# Altium PCB PCB1.PcbDoc
Units mm, origin at the board's own origin, x right, y up, seen from the top; angles counter-clockwise.
Board outline 106.93 x 40.39 mm, 2 copper layers (Top Layer, Bottom Layer); 17 components, 11 nets, 62 pads, 0 vias.
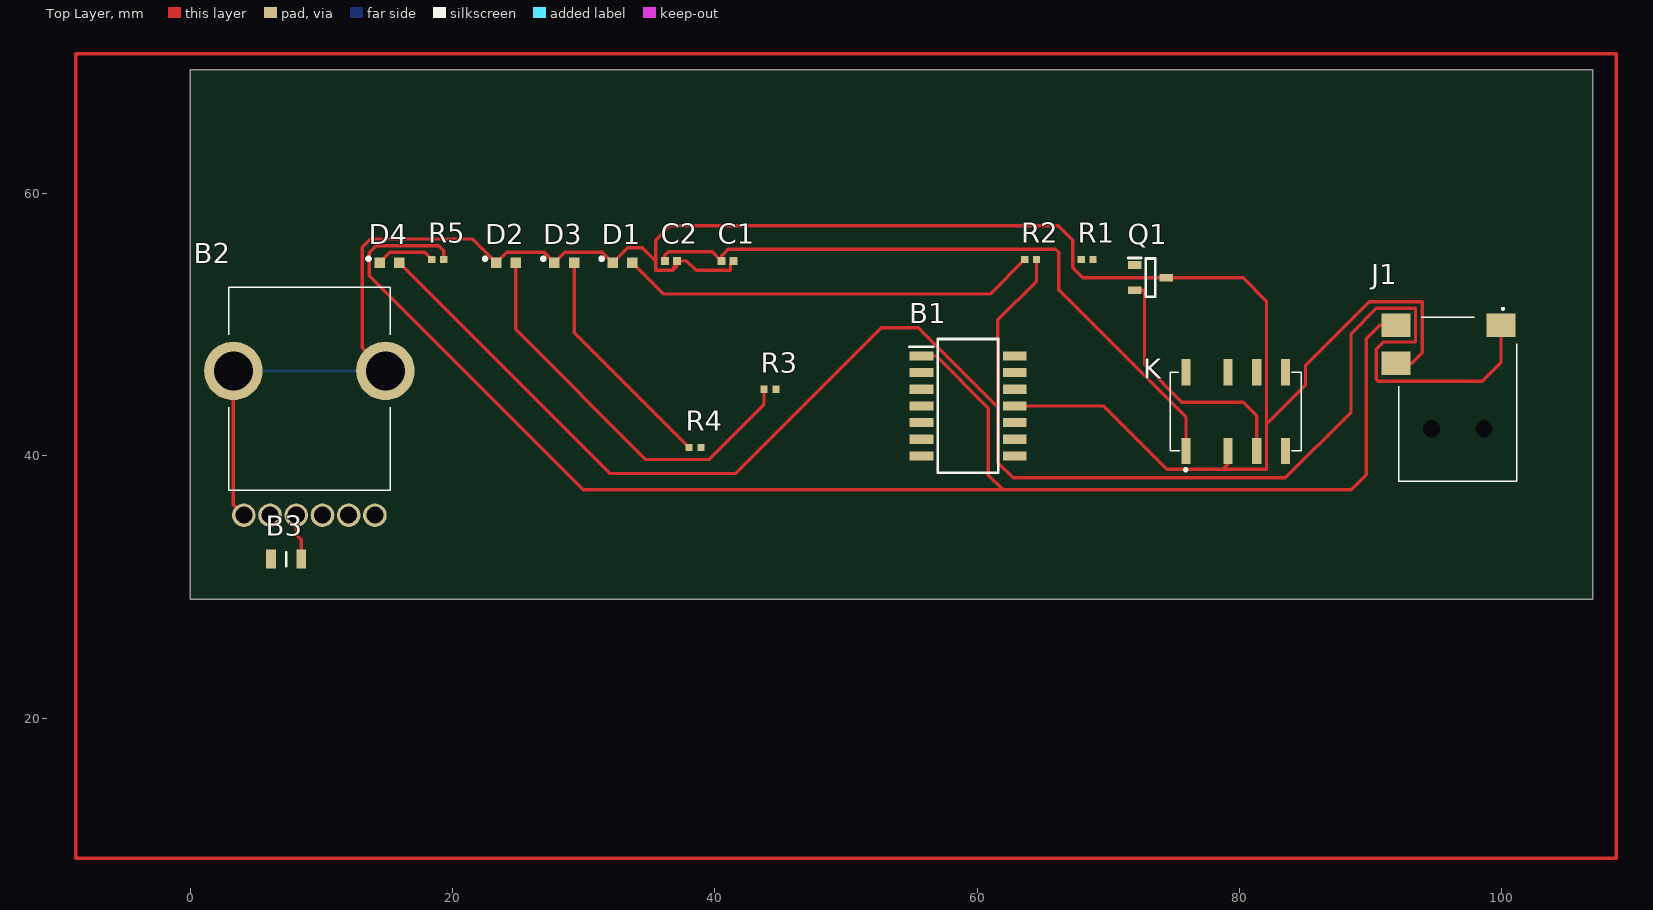
[diagram p0: Top Layer view]
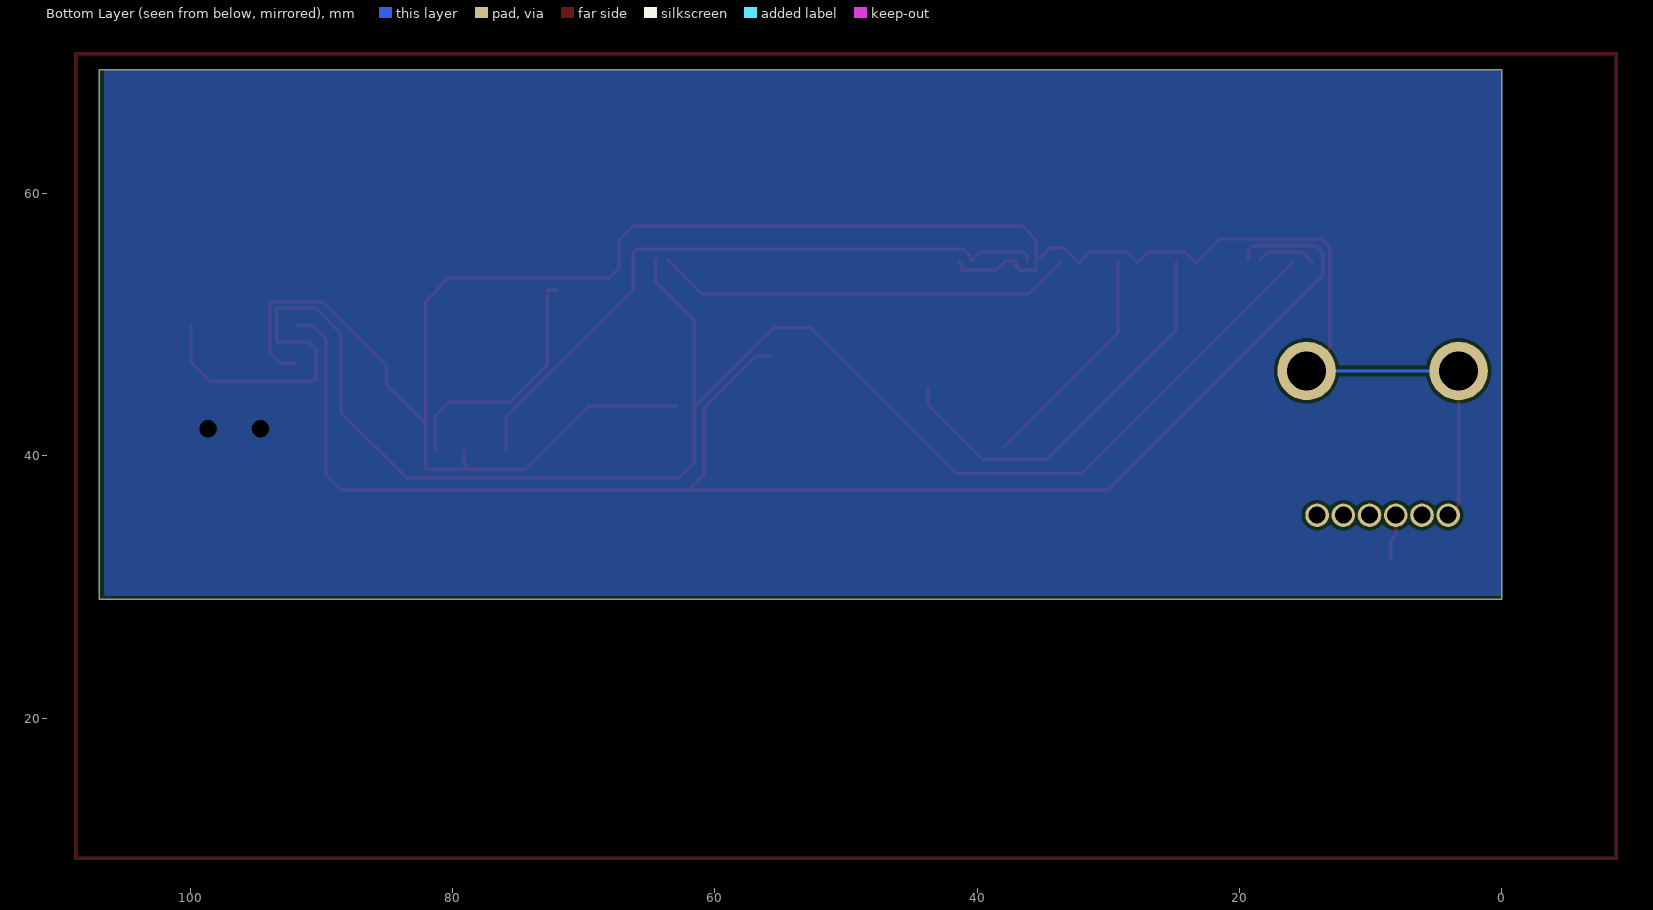
[diagram p1: Bottom Layer view, seen from below]
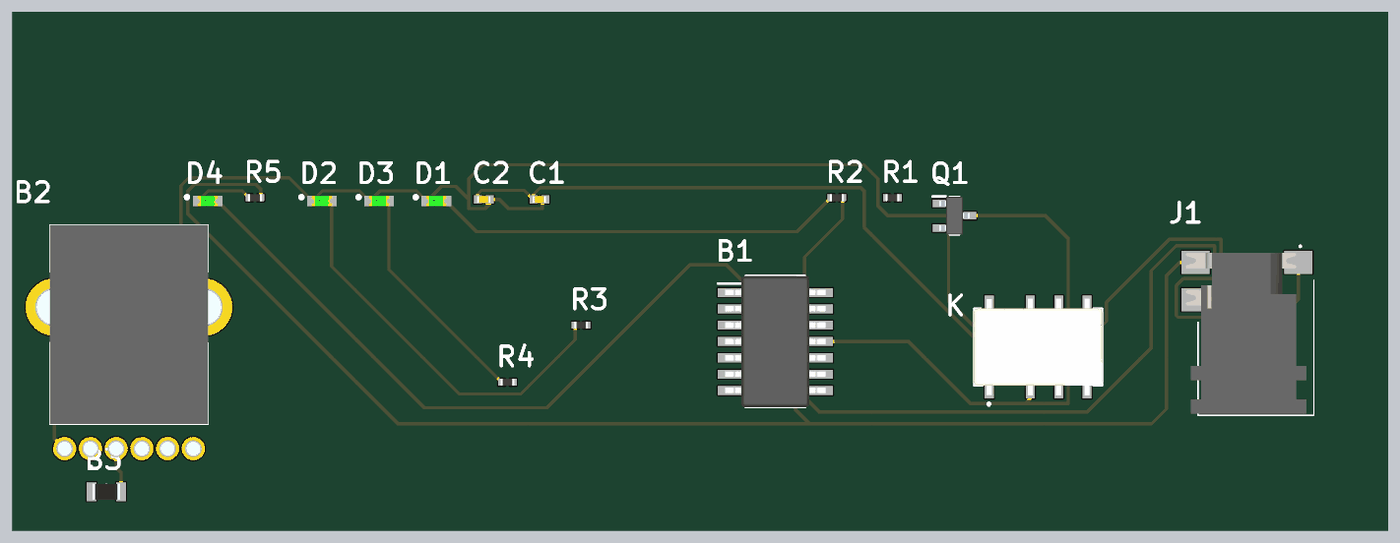
[diagram p2: 3D render of the assembled board from above, using the file's embedded part models]

## Layer stack, top to bottom
Top Solder: solder mask 0.0102, Solder Resist, Dk 3.5
Top Layer: signal copper 0.0356
Dielectric 1: dielectric 0.32, FR-4, Dk 4.8
Bottom Layer: signal copper 0.0356
Bottom Solder: solder mask 0.0102, Solder Resist, Dk 3.5

## Board outline
0,29.083 0,69.469 106.934,69.469 106.934,29.083

## Design rules (kind name [scope] priority, off if disabled: settings)
Clearance [All] p1: gap=0.254 ignorepadtopadclearanceinfootprint=FALSE except(0: Arc-Hole Track-Hole SMDPad-Hole THPad-Hole Via-Hole Fill-Hole Poly-Hole Region-Hole Text-Hole)
PolygonConnect [All] p1: connectstyle=Relief reliefconductorwidth=0.254 reliefentries=4 polygonreliefangle="90 Angle" airgapwidth=0.254
RoutingVias [All] p1: holewidth=0.711 width=1.27 viastyle="Through Hole" minholewidth=0.711 minwidth=1.27 maxholewidth=0.711 maxwidth=1.27
SolderMaskExpansion [All] p1: expansion=0.102 istentingtop=FALSE
SupplyNets "Schematic Supply Nets_4" [InNet('VCC')] p1: voltage=0.000
SupplyNets "Schematic Supply Nets_3" [InNet('+12')] p2: voltage=0.000
SupplyNets "Schematic Supply Nets_2" [InNet('GND')] p3: voltage=0.000
SupplyNets "Schematic Supply Nets_1" [InNet('+12V')] p4: voltage=0.000
SupplyNets "Schematic Supply Nets" [InNet('12V')] p5: voltage=0.000
Width [All] p1: maxlimit=0.254 minlimit=0.254 preferedwidth=0.254
30 further rules are at their usual default settings.

## Components (designator, comment, footprint, x,y, rotation, side; value= is the part's Value field where it differs from the comment)
B1 "LM324NSR" SOIC127P780X200-14N 59.305,43.815 r0 top
B2 "PTV112-4420A-B104" PTV1124420AB104 6.077,35.482 r0 top
B3 "NB12K00103JBB" RESC2212X50N 7.31,32.131 r0 top
C1 "100nF" CAPC1005X06N 40.965,54.864 r0 top
C2 "10µF" CAPC1005X06N 36.647,54.864 r0 top
D1 "LED-GREEN" SMD-1608-LED 32.964,54.737 r0 top
D2 "LED-GREEN" SMD-1608-LED 24.074,54.737 r0 top
D3 "LED-GREEN" SMD-1608-LED 28.519,54.737 r0 top
D4 "LED-GREEN" SMD-1608-LED 15.184,54.737 r0 top
J1 "ADC-028-1-T/R" PJ1021SMTTR 96.649,44.323 r90 top
K "IM06GR" RELAY_IM06GR 79.723,43.386 r90 top
Q1 "BCW66GLT3G" SOT96P237X111-3N 73.223,53.594 r0 top
R1 "1K" RESC1005X06N 68.397,54.991 r0 top
R2 "Value" RESC1005X06N 64.079,54.991 r0 top
R3 "400Ω" RESC1005X06N 44.203,45.085 r0 top
R4 "1kΩ" RESC1005X06N 38.483,40.64 r0 top
R5 "Value" RESC1005X06N 18.867,54.991 r0 top

## Footprints (in the part's own frame and the unit in brackets; to place one, negate y for a bottom-side part, rotate by r counter-clockwise, add the part's x,y. Pads: shape width x height; smd on the part's side, far side on the other; paste and mask are expansions set on the pad)
CAPC1005X06N [mm] "Chip Capacitor, 2-Leads, Body 1,00x0,50mm, IPC Medium Density"
  rect 0.62x0.62 smd: 1(-0.46,0) 2(0.46,0)
  body extent -0.53,-0.28 0.53,0.28, height 0.55
PJ1021SMTTR [mm]
  rect 1.8x2.2 smd: 1(5.65,-3.3) 2(2.75,4.7) 3(5.65,4.7)
  round 0.65 hole 1.3 unplated: MH1(-2.25,-2) MH2(-2.25,2)
  silkscreen extent -6.25,-4.5 6.95,4.5, body extent -6.12,-3.94 6.38,5.46, height 6.01
PTV1124420AB104 [mm]
  round 1.8 hole 1.3: A1(0,0) A2(-2,0) A3(8,0) B1(2,0) B2(4,0) B3(6,0)
  round 4.455 hole 2.97: MH1(-2.8,11) MH2(8.8,11)
  silkscreen extent -3.15,-1.45 9.15,17.4, body extent -4.17,-0.55 10.19,17.4, height 20.6
RELAY_IM06GR [mm]
  rect 2x0.7 smd: 1(-3,3.8) 2(-3,0.6) 3(-3,-1.6) 4(-3,-3.8) 5(3,-3.8) 6(3,-1.6) 7(3,0.6) 8(3,3.8)
  silkscreen extent -4.54,-5 3,5, body extent -3.75,-5 3.75,5, height 5.65
RESC1005X06N [mm] "Chip Resistor, 2-Leads, Body 1,00x0,50mm, IPC Medium Density"
  rect 0.55x0.55 smd: 1(-0.45,0) 2(0.45,0)
  body extent -0.53,-0.28 0.53,0.28, height 0.55
RESC2212X50N [mm]
  rect 0.75x1.45 smd: 1(-1.15,0) 2(1.15,0)
  silkscreen extent 0,-0.53 0,0.53, body extent -1.07,-0.63 1.07,0.63, height 0.5
SMD-1608-LED [mm]
  rect 0.8x0.8 smd paste+0 mask+0: 1(-0.75,0) 2(0.75,0)
  silkscreen extent -1.72,0.18 -1.47,0.42, body extent -1.25,-0.55 1.25,0.55, height 0.25
SOIC127P780X200-14N [mm]
  rect 1.825x0.7 smd: 1(-3.562,3.81) 2(-3.562,2.54) 3(-3.562,1.27) 4(-3.562,0) 5(-3.562,-1.27) 6(-3.562,-2.54) 7(-3.562,-3.81) 8(3.562,-3.81) 9(3.562,-2.54) 10(3.562,-1.27) 11(3.562,0) 12(3.562,1.27) 13(3.562,2.54) 14(3.562,3.81)
  silkscreen extent -4.47,-5.1 2.3,5.1, body extent -3.9,-5.1 3.9,5.1, height 2
SOT96P237X111-3N [mm]
  rect 1x0.6 smd: 1(-1.2,0.955) 2(-1.2,-0.955) 3(1.2,0)
  silkscreen extent -1.7,-1.46 0.35,1.51, body extent -1.18,-1.46 1.18,1.46, height 1.11

## Part data
B1: "Quadruple Operational Amplifier", Manufacturer_Name="Texas Instruments", Mouser Part Number=595-LM324NSR, Arrow Part Number=LM324NSR, Arrow Price/Stock=https://www.arrow.com/en/products/lm324nsr/texas-instruments?utm_currency=USD&region=nac, Datasheet Link=http://www.ti.com/lit/gpn/LM324, Geometry.Height=2mm, Manufacturer_Part_Number=LM324NSR, Mouser Price/Stock=https://www.mouser.co.uk/ProductDetail/Texas-Instruments/LM324NSR?qs=VBduBm9rCJQcjq4eh95DkA%3D%3D
B2: "Potentiometers PANEL CONTROL 100kOhm", Manufacturer_Name=Bourns, Mouser Part Number=652-PTV1124420AB104, Datasheet Link=https://www.bourns.com/docs/Product-Datasheets/PTVPTT.pdf, Geometry.Height=20.5mm, Manufacturer_Part_Number=PTV112-4420A-B104, Mouser Price/Stock=https://www.mouser.co.uk/ProductDetail/Bourns/PTV112-4420A-B104?qs=nqw9FAyaR8PT4wHHFlLdhA%3D%3D
B3: "NTC SMD Thermistor, NB12K, 10K, 5% AVX 10k 0805 Protection NTC Thermistor, 5s, 2 x 1.25 x 1.3mm", Manufacturer_Name="Kyocera AVX", Mouser Part Number=581-NB12K00103JBB, Arrow Part Number=NB12K00103JBB, Arrow Price/Stock=https://www.arrow.com/en/products/nb12k00103jbb/avx, Datasheet Link=https://datasheet.datasheetarchive.com/originals/distributors/Datasheets-DGA6/551314.pdf, Geometry.Height=0.5mm, Manufacturer_Part_Number=NB12K00103JBB, Mouser Price/Stock=https://www.mouser.co.uk/ProductDetail/AVX/NB12K00103JBB/?qs=4%252B6%252BTdINQeDPvI%252BQUQjJ3Q%3D%3D
C1 C2: library part Capacitor
D1 D2 D3 D4: "LED GREEN CLEAR CHIP SMD LTST-C190GKT", Case Code (Imperial)=0603, Case Code (Metric)=1608, Color=Green, Forward Current=30mA, Forward Voltage=2.1V, Lens Color=Colorless, Max Operating Temperature=85°C, Min Operating Temperature=-55°C, Package Quantity=1, Power Dissipation=100mW, Reverse Voltage=5V, Test Current=10mA, Voltage=2V, Case/Package=0603, Depth=0.8mm, Dominant Wavelength=569nm, Height=0.8mm, Illumination Color=Green, Lead Free="Lead Free", Length=1.6mm, Lens Style=Clear, Lens Transparency=Clear, Luminous Intensity=6mcd, Mount="Surface Mount", Number of Elements=1, Number of LEDs=1, Number of Pins=2, Packaging="Tape and Reel", Power Rating=100mW, Radiation Hardening=No, Viewing Angle=130°, Wavelength=565nm, Width=0.8mm
J1: "Connecteurs d'alimentation continue DC POWER JACK 2MM PIN TYPE 028", Manufacturer_Name="Same Sky", Mouser Part Number=737-ADC-028-1-T/R, Geometry.Height=6mm, Manufacturer_Part_Number=ADC-028-1-T/R, Mouser Price/Stock=https://www.mouser.fr/ProductDetail/Adam-Tech/ADC-028-1-T-R?qs=TTVbHWoAP%2FSiqsZeR9Co0Q%3D%3D
K: "Electromechanical Relay 12VDC 1.029KOhm 2A DPDT _10x7.5x5.65_mm SMD Signal Relay", Package=None, Availability=Unavailable, MF="TE Connectivity", MP=IM06GR, Price=None, SnapEDA_Link=https://www.snapeda.com/parts/IM06GR/TE%20Connectivity%20Potter%20%26%20Brumfield%20Relays/view-part/264147/?ref=snap, TE_purchase_URL=https://www.te.com/usa-en/product-2-1462037-3.html?te_bu=Cor&te_type=disp&te_campaign=seda_glo_cor-seda-global-disp-prtnr-fy19-seda-model-bom-cta_sma-317_1&elqCampaignId=32493
Q1: "NPN Bipolar Transistor", Manufacturer_Name=onsemi, Mouser Part Number=863-BCW66GLT3G, Arrow Part Number=BCW66GLT3G, Arrow Price/Stock=https://www.arrow.com/en/products/bcw66glt3g/on-semiconductor?region=europe, Datasheet Link=http://www.onsemi.com/pub/Collateral/BCW66GLT1-D.PDF, Geometry.Height=1.11mm, Manufacturer_Part_Number=BCW66GLT3G, Mouser Price/Stock=https://www.mouser.co.uk/ProductDetail/onsemi/BCW66GLT3G?qs=XfkxeqX9xWXeTiewInI3Nw%3D%3D
R1 R2 R3 R4 R5: library part Resistor

## Nets (pads, with @x,y where several pads share a name; then routed paths per layer and width w, separated by ;. In a path a pad name is that pad's centre, name@x,y a point inside that pad or via, vN(x,y) a via of type N, cw(c..) or ccw(c..) an arc to the next point about the centre after c; other vN are vias at no path point)
+12: C1.1 C2.1 K.1 | length 50.7
  Top Layer w0.254: C2.1 36.187,55.29 36.472,55.575 39.794,55.575 C1.1 40.505,55.245 41.033,55.773 65.967,55.773 66.215,55.524 66.215,52.684 75.923,42.977 K.1
+12V: B2.A1
GND: B1.11 B2.A2 B2.MH1 B2.MH2 C1.2 C2.2 D1.1 D2.1 D3.1 J1.2 K.2 Q1.3 | length 178.2
  Top Layer w0.254: B2.MH1 3.277,36.282 B2.A2 ; B2.MH2 13.106,48.253 13.106,55.931 13.716,56.54 21.521,56.54 D2.1 24.111,55.524 26.982,55.524 D3.1 28.556,55.524 31.427,55.524 D1.1 33.357,55.88 34.465,55.88 35.481,54.864 ; C1.2 41.196,54.635 41.196,54.153 38.58,54.153 37.869,54.864 C2.2 ; B1.11 69.619,43.815 74.445,38.989 78.742,38.989 ; K.2 79.123,39.37 78.742,38.989 ; J1.2 93.146,47.073 93.938,47.865 93.938,51.762 89.91,51.762 85.037,46.888 85.037,45.39 82.065,42.418 ; 35.481,54.864 35.481,56.462 36.576,57.556 66.19,57.556 67.282,56.464 67.282,54.356 68.044,53.594 Q1.3 80.287,53.594 82.065,51.816 82.065,42.418 ; 35.481,54.864 35.481,54.153 36.777,54.153 ; 36.777,54.153 C2.2 ; 36.777,54.153 37.107,54.483 C2.2 ; 78.742,38.989 82.065,38.989 82.065,42.418
  Bottom Layer w0.254: B2.MH1 B2.MH2
NetB1_1: B1.1 J1.3 R5.2 | length 118.3
  Top Layer w0.254: R5.2 19.317,55.651 18.936,56.032 14.171,56.032 13.637,55.499 13.637,53.746 29.97,37.414 61.976,37.414 ; B1.1 56.868,47.625 60.856,43.637 60.856,38.534 61.976,37.414 ; J1.3 90.714,49.973 89.685,48.944 89.685,38.557 88.542,37.414 61.976,37.414
NetB2_B1: B2.B1 B3.2 | length 3.5
  Top Layer w0.254: B2.B1 8.077,33.987 8.46,33.604 B3.2
NetD1_2: D1.2 R2.1 | length 32
  Top Layer w0.254: D1.2 36.102,52.349 60.987,52.349 R2.1
NetD2_2: D2.2 R3.1 | length 31
  Top Layer w0.254: D2.2 24.824,49.646 34.745,39.726 39.52,39.726 43.753,43.959 R3.1
NetD3_2: D3.2 R4.1 | length 17.7
  Top Layer w0.254: D3.2 29.269,49.404 R4.1
NetD4_1: D4.1 R5.1 | length 4.5
  Top Layer w0.254: D4.1 15.221,55.524 17.884,55.524 R5.1
NetK_3: K.3 Q1.2 | length 19.3
  Top Layer w0.254: Q1.2 72.769,52.639 72.769,46.939 75.613,44.094 80.282,44.094 81.323,43.053 K.3
VCC: D4.2 J1.1 R2.2 | length 138.4
  Top Layer w0.254: D4.2 32.012,38.659 41.552,38.659 52.677,49.784 55.502,49.784 61.567,43.719 ; R2.2 64.529,53.33 61.567,50.368 61.567,43.719 ; J1.1 99.949,47.117 98.527,45.695 90.599,45.695 90.447,45.847 90.447,48.133 91.006,48.692 93.43,48.692 93.43,51.254 90.447,51.254 88.517,49.324 88.517,43.332 83.513,38.329 62.736,38.329 61.567,39.497 61.567,43.719
pads on no net: B1.2 B1.3 B1.4 B1.5 B1.6 B1.7 B1.8 B1.9 B1.10 B1.12 B1.13 B1.14 B2.A3 B2.B2 B2.B3 B3.1 J1.MH1 J1.MH2 K.4 K.5 K.6 K.7 K.8 Q1.1 R1.1 R1.2 R3.2 R4.2
copper on no net: | length 357.6
  Top Layer w0.254: -8.737,9.33 108.738,9.33 108.738,70.671 -8.737,70.671 -8.737,9.33

## Polygon pours and split planes (outlines as drawn)
no net on Bottom Layer "NONET_L02_P000" (solid, pour order 0): 0,69.215 0.254,69.469 106.553,69.469 106.553,29.591 106.807,29.337 0,29.337

## Silkscreen, mask and mechanical layers (free items; w line width, h text height)
Mechanical 15:
  lines w0.254: 0,29.083 106.934,29.083 106.934,69.469 0,69.469 0,29.083 ; 0,40.132 0,40.576 0,40.132 ; 150.622,-46.355 266.573,-46.355 266.573,2.032 150.622,2.032 150.622,-46.355